# Altium PCB KSG_REFLOW_0825_BOARD_ksv.PcbDoc
Units mm, origin at the board's own origin, x right, y up, seen from the top; angles counter-clockwise.
Board outline 37 x 13.8 mm, 2 copper layers (Top Layer, Bottom Layer), stack 1.07 mm thick; 4 components, 3 nets, 22 pads, 20 vias.
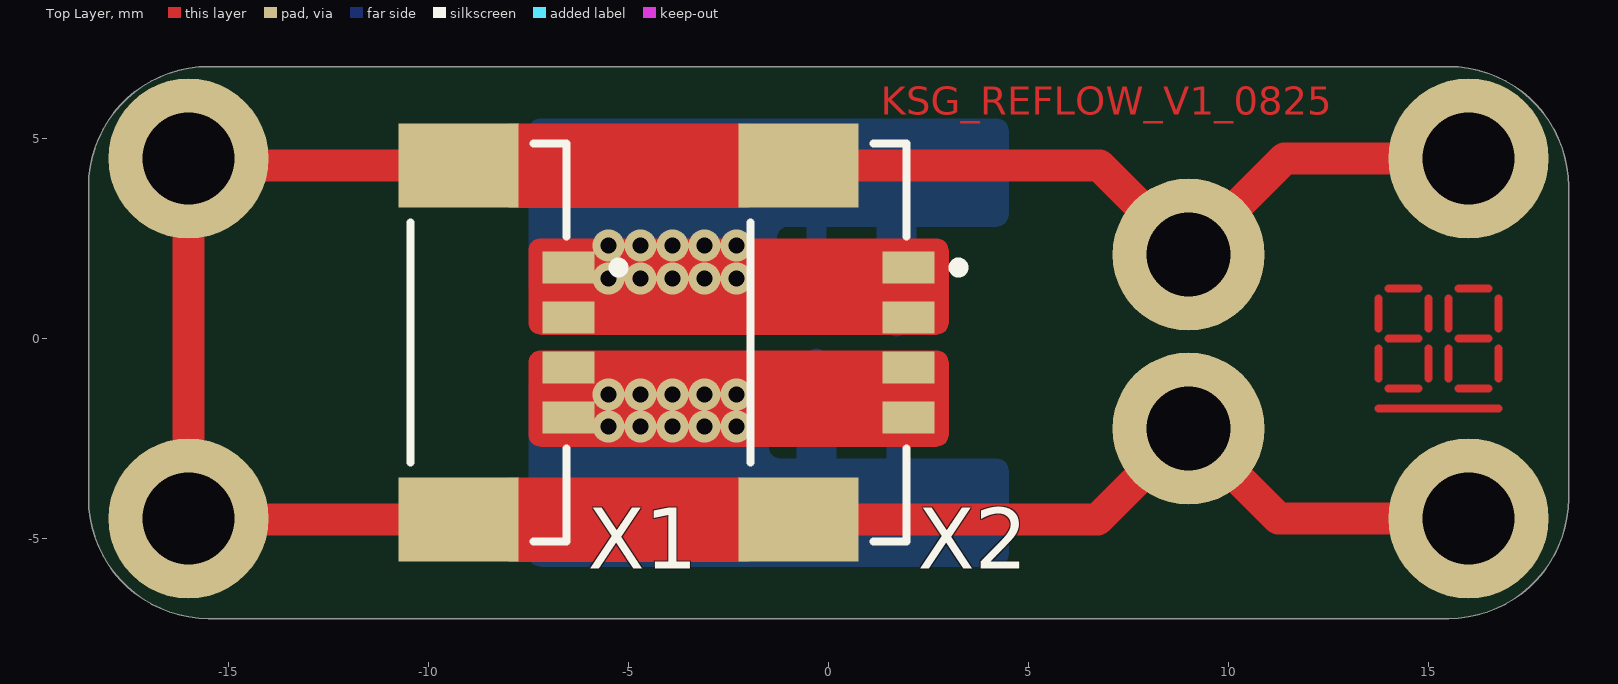
[diagram p0: Top Layer view]
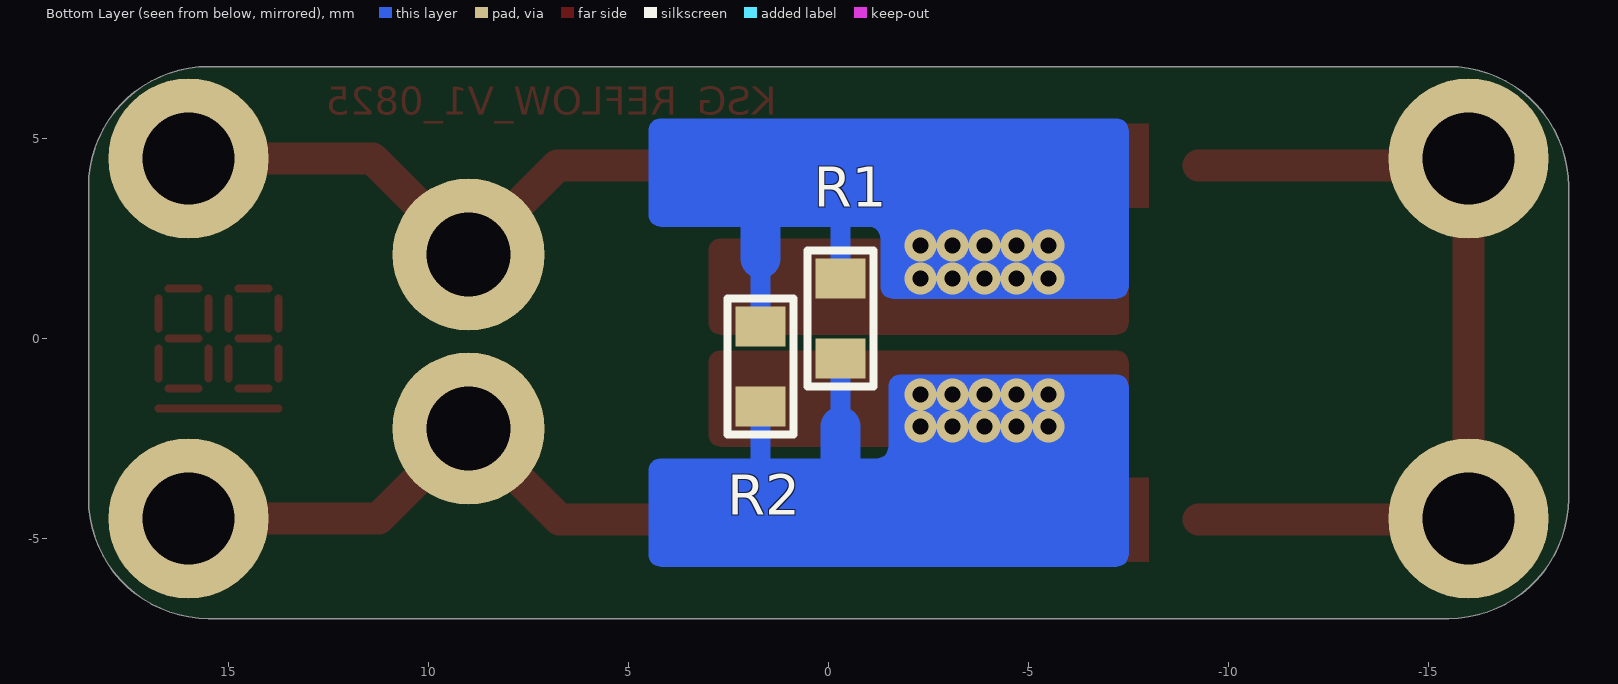
[diagram p1: Bottom Layer view, seen from below]

## Layer stack, top to bottom
Top Solder: solder mask 0.0102, Solder Resist, Dk 3.5
Top Layer: signal copper 0.035
Dielectric 1: core 1, FR4 Tg150, Dk 4.6
Bottom Layer: signal copper 0.035
Bottom Solder: solder mask 0.0102, Solder Resist, Dk 3.5

## Board outline
-18.5,-4 ccw(c-15.5,-4) -15.5,-7 15.5,-7 ccw(c15.5,-4) 18.5,-4 18.5,3.8 ccw(c15.5,3.8) 15.5,6.8 -15.5,6.8 ccw(c-15.5,3.8) -18.5,3.8

## Design rules (kind name [scope] priority, off if disabled: settings)
Clearance [All] p1: gap=0.254 ignorepadtopadclearanceinfootprint=FALSE except(0: Arc-Hole Track-Hole SMDPad-Hole THPad-Hole Via-Hole Fill-Hole Poly-Hole Region-Hole Text-Hole; 0.3: Arc-Arc Arc-Track Track-Track)
PolygonConnect [All] p1: connectstyle=Relief reliefconductorwidth=0.254 reliefentries=4 polygonreliefangle="90 Angle" airgapwidth=0.254
RoutingVias [All] p1: holewidth=0.6 width=1 viastyle="Through Hole" minholewidth=0.4 minwidth=0.7 maxholewidth=0.711 maxwidth=1.27
SolderMaskExpansion [All] p1: expansion=0.102 istentingtop=FALSE
Width [All] p1: maxlimit=1.5 minlimit=0.2 preferedwidth=0.5
30 further rules are at their usual default settings.

## Components (designator, comment, footprint, x,y, rotation, side; value= is the part's Value field where it differs from the comment)
R1 "Resistor film, 100R, , 0805, 0.125W, -55...+125°C" "RES: 0805" -0.3,0.5 r270 bottom locked value=100R
R2 "Resistor film, 100R, , 0805, 0.125W, -55...+125°C" "RES: 0805" 1.7,-0.7 r270 bottom value=100R
X1 "533980471" FP-533980471-MFG -8.5,-0.1 r90 top locked
X2 "533980471" FP-533980471-MFG 0,-0.1 r90 top locked

## Footprints (in the part's own frame and the unit in brackets; to place one, negate y for a bottom-side part, rotate by r counter-clockwise, add the part's x,y. Pads: shape width x height; smd on the part's side, far side on the other; paste and mask are expansions set on the pad)
FP-533980471-MFG [mm]
  rect 0.8x1.3 smd paste+0 mask+0: 1(1.875,-2) 2(0.625,-2) 3(-0.625,-2) 4(-1.875,-2)
  rect 2.1x3 smd paste+0 mask+0: 5(-4.425,0.75) 6(4.425,0.75)
  silkscreen extent -4.97,-3.38 4.97,1.95, body extent -5.58,-2.75 5.58,2.35, height 0.25
"RES: 0805" [mm]
  rect 1x1.25 smd: 1(-1,0) 2(1,0)
  silkscreen extent -1.7,-0.82 1.7,0.82, body extent -1,-0.6 1,0.6, height 0.44

## Part data
R1 R2: library part Resistor_0805, Manufacturer=Yageo, Package=0805, PartNumber=RC0805JR-07100RL, Power=0.125W, Temperature=-55...+125°C, TypeResistor="Resistor film", HelpURL=https://www.digikey.com/product-detail/en/yageo/RC0805JR-07100RL/311-100ARCT-ND/731185, ValueManufacturerPartNumber="Resistor film, 100R, , 0805, 0.125W, -55...+125°C"
X1 X2: library part CMP-04776-000105-1, "CONN HEADER SMD 4POS 1.25MM", Ambient Temperature Range High=+105°C, Ambient Temperature Range Low=-40°C, Current Rating=1A, Manufacturer=Molex, Package=0, Temperature="-40°C to +105°C", Voltage Rating=125V, Automotive=No, Category=Conn, ComponentLink2Description=Datasheet, ComponentLink2URL=https://www.molex.com/pdm_docs/ps/PS-51021-024-001.pdf, Conn Gender=Male, Conn Orientation=Vertical, Contact Material=Tin, Device Class L1=Connectors, Device Class L2="Headers and Wire Housings", Device Class L3=unset, Digikey Description="CONN HEADER SMD 4POS 1.25MM", Footprint Url=https://www.molex.com/pdm_docs/sd/533980471_sd.pdf, Height=5.1mm, Lead Free=Yes, Manufacturer Part Number=533980471, Number Of Contacts=4, Number Of Rows=1, Octopart=https://octopart.com/53398-0471-molex-655296, Pitch=1.25mm, RoHS=TRUE, Standoff Height=0.05mm, Temperature Range High=+105°C, Temperature Range Low=-40°C

## Free pads (board coordinates)
  round 4 hole 2.3: 4(-16,-4.5) 4(-16,4.5) 4(16,-4.5) 4(16,4.5)
  round 3.8 hole 2.1: 5(9,2.1) 6(9,-2.25)

## Via types
v1: diameter 0.8, hole 0.4, Top Layer to Bottom Layer, 20 vias

## Nets (pads, with @x,y where several pads share a name; then routed paths per layer and width w, separated by ;. In a path a pad name is that pad's centre, name@x,y a point inside that pad or via, vN(x,y) a via of type N, cw(c..) or ccw(c..) an arc to the next point about the centre after c; other vN are vias at no path point)
-BS: R1.2 R2.2 X1.3 X1.4 X2.3 X2.4 | length 4.5
  Bottom Layer w0.5: -0.3,-2.2 R1.2 ; 1.7,-3.2 R2.2
  Bottom Layer w1: -0.3,-3.5 -0.3,-2.2
  other v1: -5.5,-2.2 -4.7,-2.2 -3.9,-2.2 -3.1,-2.2 -2.3,-2.2 -5.5,-1.4 -4.7,-1.4 -3.9,-1.4 -3.1,-1.4 -2.3,-1.4
CASE: pad.4 pad.5 pad.6 X1.5 X1.6 X2.5 X2.6 | length 59.9
  Top Layer w0.8: X1.5 -15.975,-4.525 -16,-4.5 -16,4.5 -15.825,4.325 X1.6 ; X2.5 6.725,-4.525 pad.6 11.25,-4.5 pad.4@16,-4.5 ; X2.6 6.775,4.325 pad.5 11.4,4.5 pad.4@16,4.5
NetR1_1: R1.1 R2.1 X1.1 X1.2 X2.1 X2.2 | length 4.5
  Bottom Layer w0.5: R1.1 -0.3,3 ; R2.1 1.7,2
  Bottom Layer w1: 1.7,2 1.7,3.3
  other v1: -5.5,1.5 -4.7,1.5 -3.9,1.5 -3.1,1.5 -2.3,1.5 -5.5,2.325 -4.7,2.325 -3.9,2.325 -3.1,2.325 -2.3,2.325
copper on no net: | length 13.5
  Top Layer w0.2: 13.75,-1.75 16.75,-1.75 ; 13.75,-1 13.75,-0.25 ; 13.75,0.25 13.75,1 ; 14,-1.25 14.75,-1.25 ; 14,0 14.75,0 ; 14,1.25 14.75,1.25 ; 15,-1 15,-0.25 ; 15,0.25 15,1 ; 15.5,-1 15.5,-0.25 ; 15.5,0.25 15.5,1 ; 15.75,-1.25 16.5,-1.25 ; 15.75,0 16.5,0 ; 15.75,1.25 16.5,1.25 ; 16.75,-1 16.75,-0.25 ; 16.75,0.25 16.75,1

## Other copper
Top Layer:
  region net -BS: -7.5,-2.4 ccw(c-7.2,-2.4) -7.2,-2.7 2.7,-2.7 ccw(c2.7,-2.4) 3,-2.4 3,-0.6 ccw(c2.7,-0.6) 2.7,-0.3 -7.2,-0.3 ccw(c-7.2,-0.6) -7.5,-0.6 -7.5,-0.8
  region net NetR1_1: -7.5,0.4 ccw(c-7.2,0.4) -7.2,0.1 2.7,0.1 ccw(c2.7,0.4) 3,0.4 3,2.2 ccw(c2.7,2.2) 2.7,2.5 -7.2,2.5 ccw(c-7.2,2.2) -7.5,2.2 -7.5,2
  region net CASE: -2,5.375 -2,3.275 -8,3.275 -8,5.375
  region net CASE: -2,-3.475 -2,-5.575 -8,-5.575 -8,-3.475
  text "KSG_REFLOW_V1_0825" at 1.3,5.6 h0.7
Bottom Layer:
  region net -BS: -7.5,-1.2 -7.5,-5.4 ccw(c-7.2,-5.4) -7.2,-5.7 4.2,-5.7 ccw(c4.2,-5.4) 4.5,-5.4 4.5,-3.3 ccw(c4.2,-3.3) 4.2,-3 -1.2,-3 cw(c-1.2,-2.7) -1.5,-2.7 -1.5,-1.2 ccw(c-1.8,-1.2) -1.8,-0.9 -7.2,-0.9 ccw(c-7.2,-1.2)
  region net NetR1_1: -7.5,1.3 -7.5,5.2 cw(c-7.2,5.2) -7.2,5.5 4.2,5.5 cw(c4.2,5.2) 4.5,5.2 4.5,3.1 cw(c4.2,3.1) 4.2,2.8 -1,2.8 ccw(c-1,2.5) -1.3,2.5 -1.3,1.3 cw(c-1.6,1.3) -1.6,1 -7.2,1 cw(c-7.2,1.3)

## Silkscreen, mask and mechanical layers (free items; w line width, h text height)
Top Solder:
  rectangle: 1.1,5.283 13.85,6.533
  region: 13.5,1.5 13.5,-2 17,-2 17,1.5
Mechanical 1:
  the board outline again, w0.254